# Altium PCB Infrared.PcbDoc
Units mil, origin at the board's own origin, x right, y up, seen from the top; angles counter-clockwise.
Board outline 6000 x 4000 mil, 2 copper layers (Top Layer, Bottom Layer); 16 components, 8 nets, 39 pads, 9 vias.
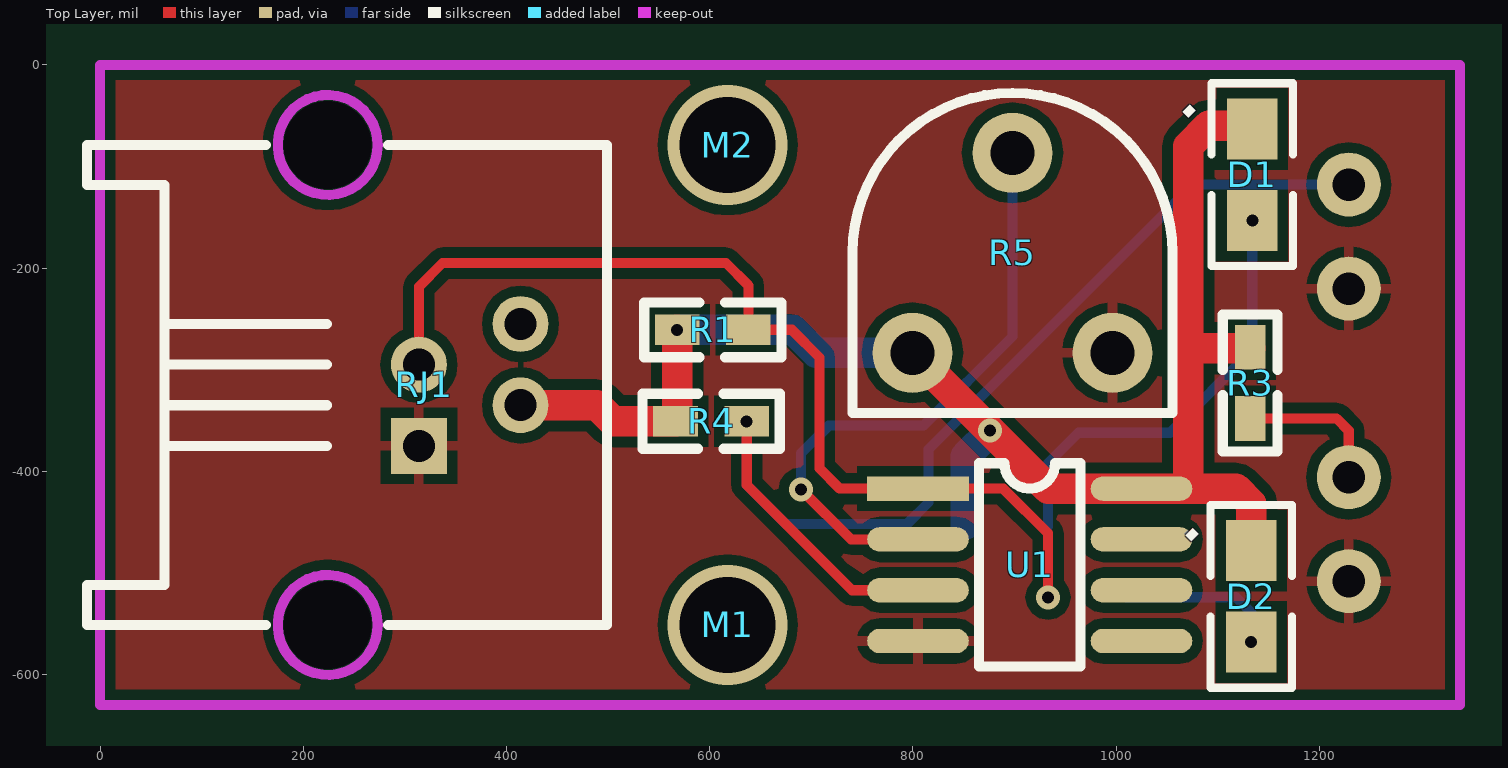
[diagram p0: Top Layer view]
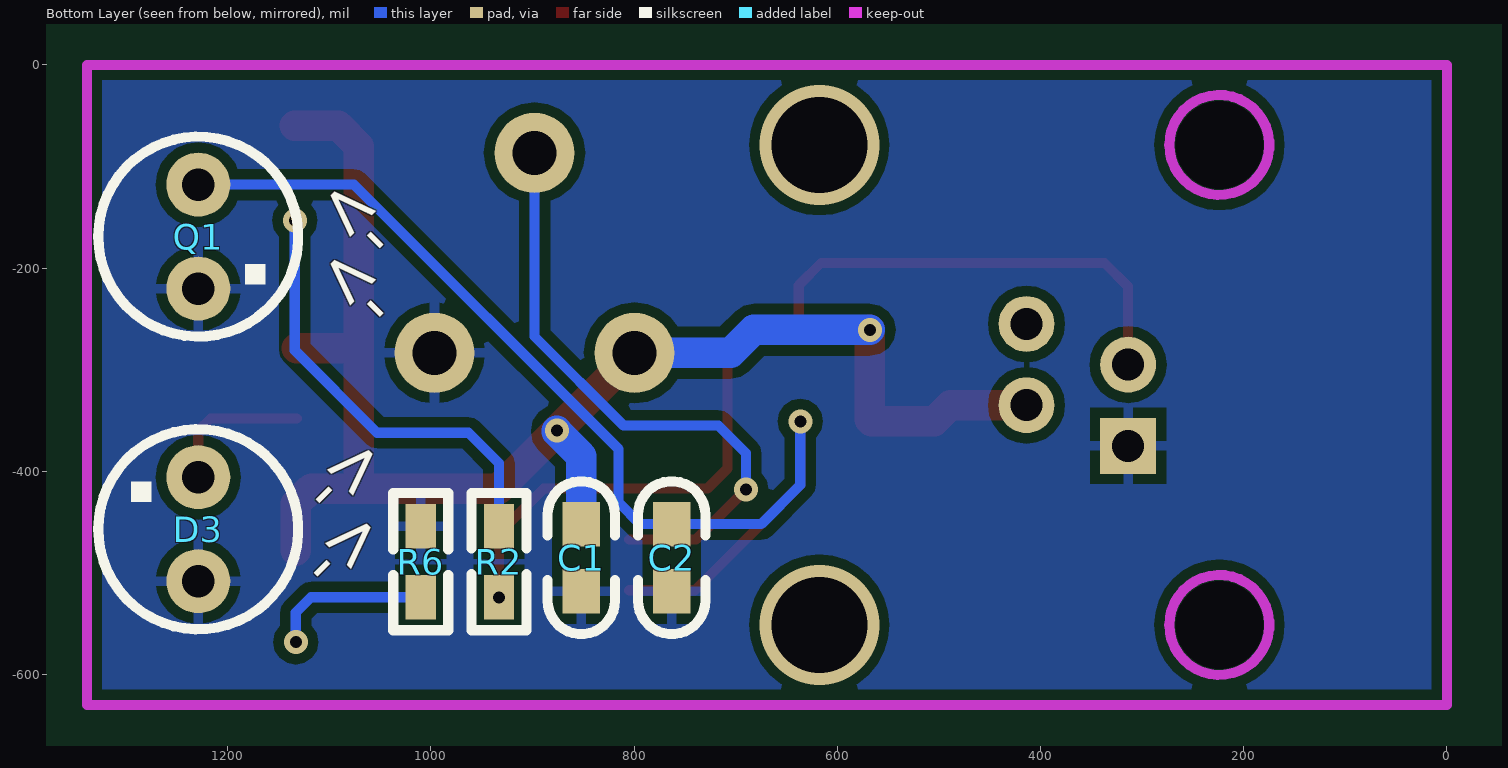
[diagram p1: Bottom Layer view, seen from below]

## Layer stack, top to bottom
Top Solder: solder mask 0.4, Solder Resist, Dk 3.5
Top Layer: signal copper 1.4
Dielectric 1: dielectric 12.6, FR-4, Dk 4.8
Bottom Layer: signal copper 1.4
Bottom Solder: solder mask 0.4, Solder Resist, Dk 3.5

## Board outline
-2066.93,-2149.61 3933.07,-2149.61 3933.07,1850.39 -2066.93,1850.39

## Design rules (kind name [scope] priority, off if disabled: settings)
Clearance [All] p1: gap=10
PolygonConnect [All] p1: connectstyle=Relief reliefconductorwidth=10 reliefentries=4 polygonreliefangle="90 Angle" airgapwidth=10
RoutingVias [All] p1: holewidth=28 width=50 viastyle="Through Hole" minholewidth=28 minwidth=50 maxholewidth=28 maxwidth=50
SolderMaskExpansion [All] p1: expansion=4
Width [All] p1: maxlimit=100 minlimit=10 preferedwidth=10
29 further rules are at their usual default settings.

## Components (designator, comment, footprint, x,y, rotation, side; value= is the part's Value field where it differs from the comment)
C1 "Cap" 0603_C 852,-485 r180 bottom
C2 "Cap" 0603_C 763,-485 r180 bottom
D1 "LED" 0805 1134,-108 r180 top
D2 "LED" 0805 1133,-523 r180 top
D3 "Infrared" 红外 1224,-452 r90 bottom
M1 "M2" M2 617.72,-551.18 r0 top
M2 "M2" M2 617.72,-78.74 r0 top
Q1 "Photo NPN" 红外 1234,-174 r270 bottom
R1 "Res2" 0603_R 603.02,-260.74 r270 top
R2 "Res2" 0603_R 933,-489 r0 bottom
R3 "Res2" 0603_R 1132,-313 r180 top
R4 "Res2" 0603_R 601.41,-350.72 r270 top
R5 "RPot" 电位器 898,-185 r180 top
R6 "Res2" 0603_R 1010,-489 r180 bottom
RJ1 "RJ11" RJ11 318.9,-314.96 r90 top
U1 "LM393" SO-8 915,-492 r90 top

## Footprints (in the part's own frame and the unit in brackets; to place one, negate y for a bottom-side part, rotate by r counter-clockwise, add the part's x,y. Pads: shape width x height; smd on the part's side, far side on the other; paste and mask are expansions set on the pad)
0603_C [mil]
  rect 37x44 smd: 1(0,-33) 2(0,33)
  silkscreen extent -33,-75 33,75
0603_R [mil]
  rect 30x44 smd: 1(0,35) 2(0,-35)
  silkscreen extent -27,-68 27,68, body extent -19,-52 20,50, height 21
0805 [mil]
  rect 50x60 smd: 1(0,-45) 2(0,45)
  silkscreen extent -40,-90 40,90
M2 [mil]
RJ11 [mm]
  round 2.1 hole 2.2 unplated: 0(-6,2.41) 0(6,2.41)
  rect 1.397x1.397 hole 0.8: 1(-1.524,0.13)
  round 1.397 hole 0.8: 2(-0.508,-2.41) 3(0.508,0.13) 4(1.524,-2.41)
  Keep-Out Layer circle w0.254: c6,2.41 r1.25
  Keep-Out Layer circle w0.254: c-6,2.41 r1.25
  silkscreen extent -6,-4.57 6,8.43
SO-8 [mil]
  rect 24x100 smd: 1(75,110)
  oval 24x100 smd: 2(25,110) 3(-25,110) 4(-75,110) 5(-75,-110) 6(-25,-110) 7(25,-110) 8(75,-110)
  silkscreen extent -100,-50 100,50
电位器 [mm]
  round 2 hole 1.1: 1(-2.5,2.5) 2(2.5,2.5) 3(0,-2.5)
  silkscreen extent -4,-4 4,4
红外 [mm]
  round 1.6 hole 0.813: 1(1.173,0.127) 2(-1.427,0.127)
  silkscreen extent -2.63,-2.37 2.37,2.63

## Part data
C1 C2: "Capacitor"
D1 D2 D3: library part LED1, "Typical RED GaAs LED"
M1 M2: library part M3
Q1: "NPN Phototransistor"
R1 R2 R3 R4 R6: "Resistor"
R5: "Potentiometer"

## Via types
v1: diameter 23.62, hole 11.81, Top Layer to Bottom Layer, 7 vias
v2: diameter 118.11, hole 94.49, Top Layer to Bottom Layer, 2 vias

## Nets (pads, with @x,y where several pads share a name; then routed paths per layer and width w, separated by ;. In a path a pad name is that pad's centre, name@x,y a point inside that pad or via, vN(x,y) a via of type N, cw(c..) or ccw(c..) an arc to the next point about the centre after c; other vN are vias at no path point)
A+: C2.2 Q1.2 R4.1 U1.3 | length 1114.6
  Top Layer w10: v1(636.41,-350.72) 636.41,-413.41 740,-517 U1.3
  Bottom Layer w10: v1(636.41,-350.72) 636.41,-413.41 675,-452 C2.2 794,-452 815.29,-430.71 815.29,-378.29 1075.75,-117.82 Q1.2
A-: R5.3 U1.2 | length 607.5
  Top Layer w10: v1(690,-418) 739,-467 U1.2
  Bottom Layer w10: v1(690,-418) 690,-382 717,-355 810.29,-355 898,-267.29 R5.3
GND: C1.1 C2.1 D3.2 Q1.1 R5.1 R6.1 RJ1.1 U1.4
NetD1_2: D1.2 R2.2 | length 437
  Bottom Layer w10: R2.2 933,-392 963,-362 1053,-362 1134,-281 v1(1134,-153)
NetD2_2: D2.2 R6.2 | length 158.2
  Bottom Layer w10: R6.2 1118,-524 1133,-539 v1(1133,-568)
NetD3_1: D3.1 R3.1 | length 147.8
  Top Layer w10: R3.1 1217,-348 1229,-360 D3.1
OUT_A: R1.1 R2.1 RJ1.3 U1.1 | length 968.2
  Top Layer w10: RJ1.3 313.78,-218.22 337,-195 616,-195 638.02,-217.02 R1.1 680.74,-260.74 708,-288 708,-397 728,-417 889,-417 933,-461 v1(933,-524)
VCC: C1.2 D1.1 D2.1 R1.2 R3.2 R4.2 R5.2 RJ1.2 U1.8 | length 1501
  Top Layer w30: RJ1.2 488.96,-334.96 504.72,-350.72 R4.2 568.02,-349.12 v1(568.02,-260.74) ; R5.2 799.57,-283.57 933,-417 U1.8 1118,-417 1133,-432 D2.1 ; U1.8@1071,-415 1071,-80 1091,-60 D1.1@1134,-60 ; 1071,-279 R3.2@1132,-279
  Bottom Layer w30: v1(568.02,-260.74) 682.31,-260.74 705,-283.43 R5.2 ; C1.2 852,-385 876,-361 v1(876,-360)
pads on no net: RJ1.0 RJ1.4 U1.5 U1.6 U1.7
copper on no net:
  other v2: 617.72,-551.18 617.72,-78.74

## Polygon pours and split planes (outlines as drawn)
GND on Top Layer "Top Layer-No Net" (solid, remove dead copper, pour order 2): -81,51 -63,33 1479,33 1479,-734 1491,-746 1451,-706 -28,-706
GND on Bottom Layer "Top Layer-No Net" (solid, remove dead copper, pour order 4): -66,53 1394,53 1414,33 1401,20 1401,-704 2,-704 -46,-656

## Keep-outs
Keep-Out Layer:
  lines w10: 0,-629.92 1338.58,-629.92 1338.58,0 0,0 0,-629.92

## Silkscreen, mask and mechanical layers (free items; w line width, h text height)
Top Overlay:
  text "." at 1059,-40 h60 r315
  text "." at 1062,-457 h60 r315
Bottom Overlay:
  text "->" at 1059.02,-194.74 h50 r45
  text "->" at 1059,-262 h50 r45
  text "->" at 1127.02,-418.74 h50 r135
  text "->" at 1129,-491 h50 r135

## Text inside footprints (layer, text, board x,y; h text height)
RJ1: Mechanical 1 "4" at 43.23,-254.96 h39.37 r270; Mechanical 1 "1" at 43.23,-394.96 h39.37 r270; Mechanical 1 "4" at 443.23,-264.96 h39.37 r270; Mechanical 1 "3" at 223.23,-304.96 h39.37 r270; Mechanical 1 "2" at 443.23,-344.96 h39.37 r270; Mechanical 1 "1" at 223.23,-384.96 h39.37 r270